# EAGLE board pr0board_spacer (EAGLE 9.6.2)

Size 86.36 x 49.53 mm. Coordinates in mm from the lower left corner, seen from the top.
Outline: 70.48,49.53 53.66,49.53 53.66,40.32 50.16,40.32 50.16,30.48 35.24,30.48 35.24,35.88 35.24,43.18 32.07,43.18 32.07,49.53 17.14,49.53 17.14,42.86 0,42.86 0,2.54 arc90 2.54,0 83.82,0 arc90 86.36,2.54 86.36,42.86 71.75,42.86 71.75,40.64 65.72,40.64 65.72,43.81 70.48,43.81
Outline: 70.48,43.81 70.48,46.67 70.48,47.62 70.48,49.53
Outline: 70.48,49.53 70.48,43.81
Outline: 39.37,8.26 46.67,8.26 46.67,2.22 39.37,2.22 39.37,8.26
Outline: 46.04,21.27 46.04,13.02 40.32,13.02 40.32,21.27 38.73,21.27 38.73,27.62 47.62,27.62 47.62,21.27 46.04,21.27
Outline: 52.07,26.99 52.07,25.4 54.93,25.4 54.93,18.73 59.69,18.73 59.69,13.02 72.71,13.02 72.71,19.37 81.92,19.37 81.92,25.72 81.92,26.04 78.11,26.04 78.11,27.62 73.98,27.62 73.98,35.88 62.23,35.88 60.64,35.88 60.64,30.8 52.07,30.8 52.07,26.99
Copper layers (1*16): Top 0.035mm / dielectric 1.5mm / Bottom 0.035mm
Design rules "default": minimum track width 6mil, minimum drill 0.35mm, track to track 6mil, track to pad 6mil, pad to pad 6mil, via to via 6mil, smd to smd 6mil, copper to edge 40mil, drill to drill 6mil, minimum pad ring 10mil, minimum via ring 8mil, stop-mask expansion 4mil, vias tented up to drill 0mil, thermal gap 10mil
tRestrict: area 0,0 to 86.4,49.5
bRestrict: area 0,0 to 86.4,49.5

## Footprints (pad centres in the part's own frame; a part is rotated, then mirrored left to right if it is on the bottom)
MA05-1 = drill 1.016 long: 1 -5.08,0; 2 -2.54,0; 3 0,0; 4 2.54,0; 5 5.08,0

## Placement (x,y rotation side)
SV5  [MA05-1]  24.13,45.72 180 top
SV6  [MA05-1]  63.5,45.72 180 top
SV7  [MA05-1]  24.13,3.81 180 top
SV8  [MA05-1]  63.5,3.81 180 top

## Library data of the parts
SV5-SV8 = con-lstb; OC_FARNELL: unknown; OC_NEWARK: unknown

## Nets
GND: SV7.1
PB4: SV5.3
PD4: SV6.3
PD6: SV6.4
S$2: SV5.2
WS2812BDO: SV8.1
WSVCC: SV6.1